# EAGLE board EveryCook_V3 (EAGLE 6.5.0)
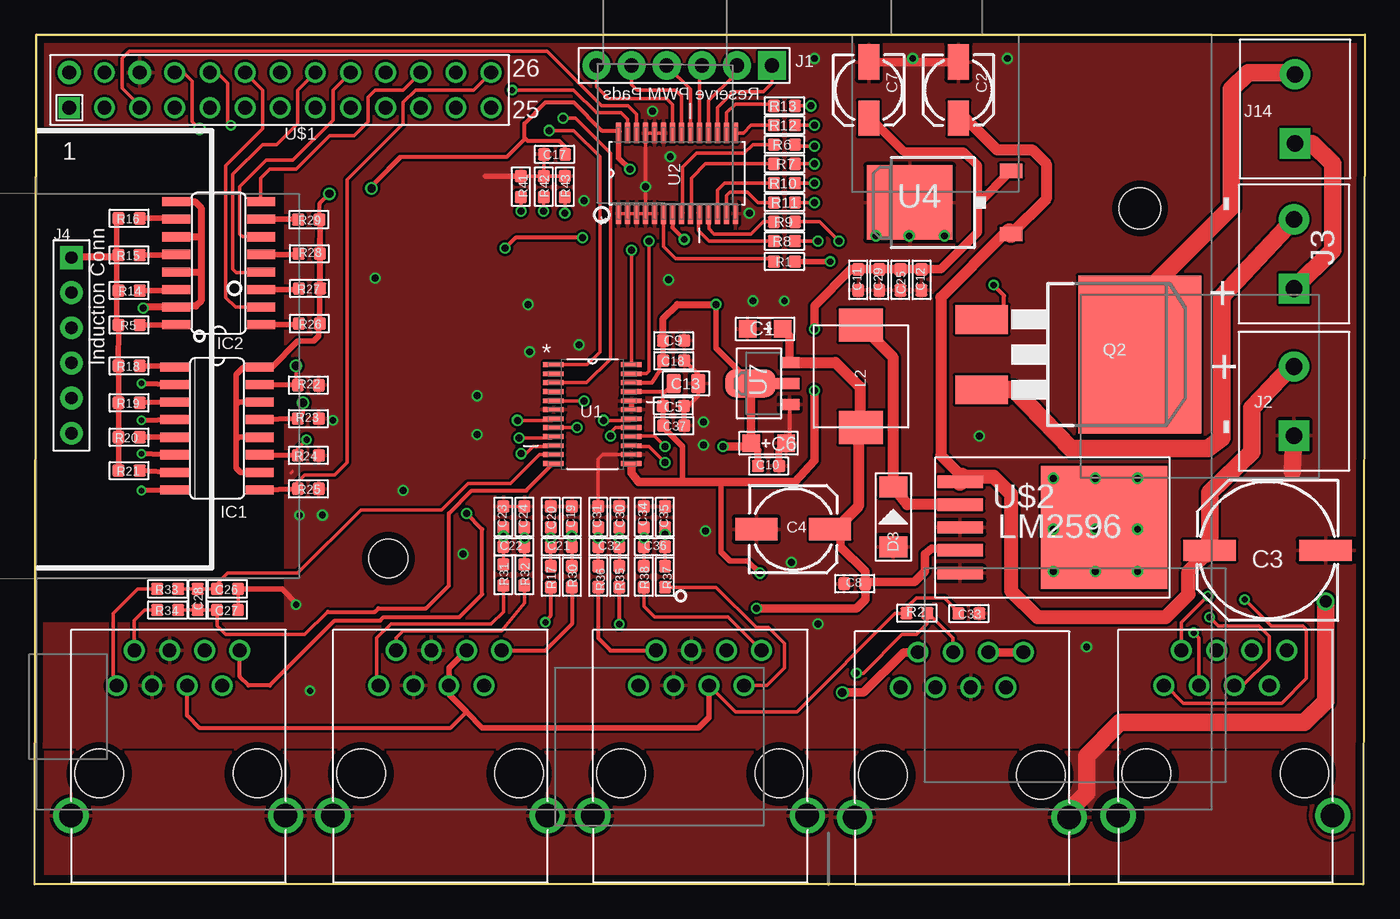
[diagram p0: board, top side]
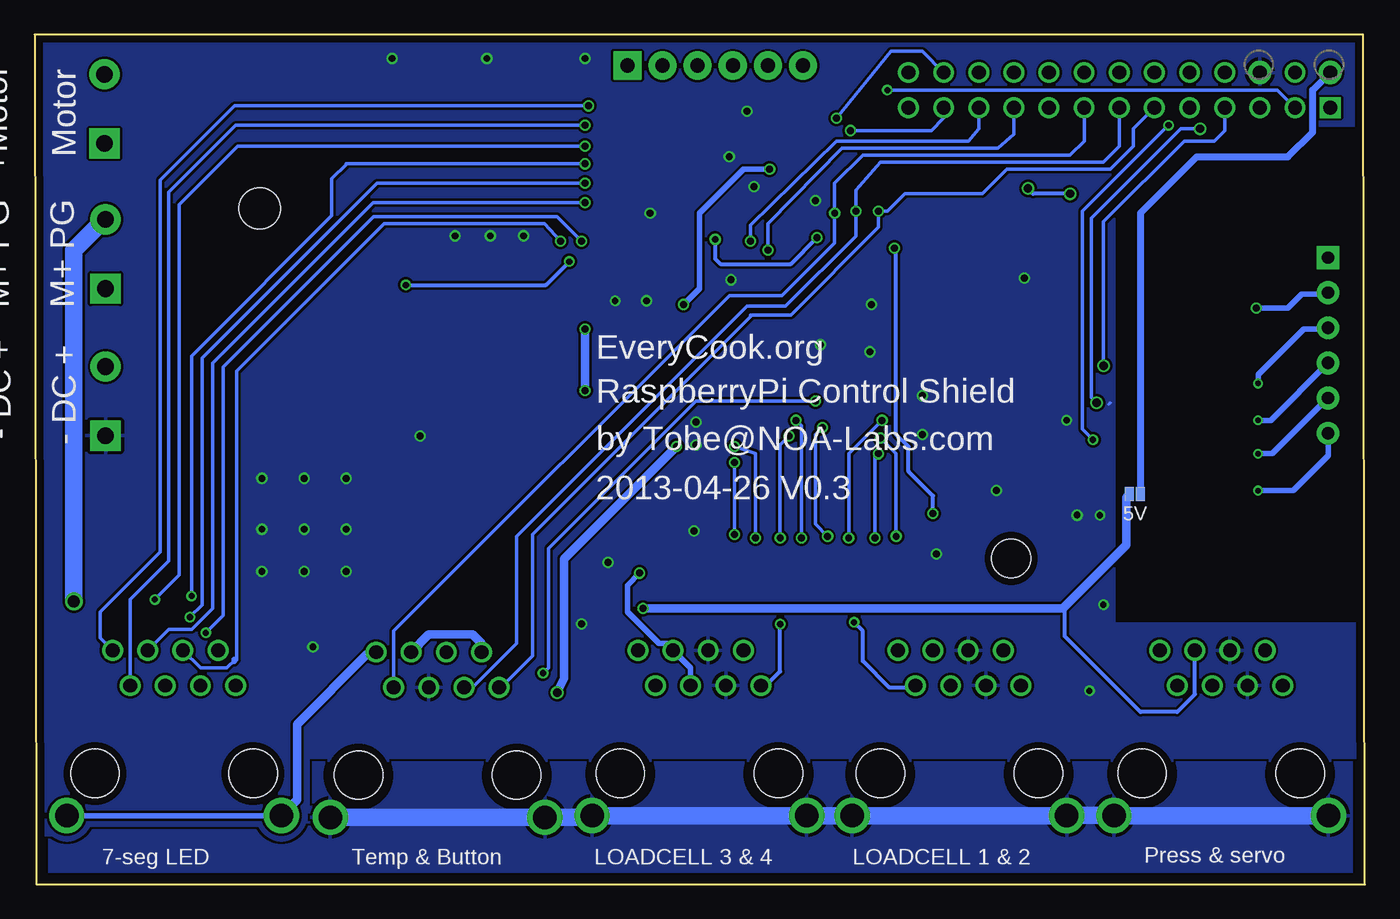
[diagram p1: board, bottom side, seen from below]

Size 96.16 x 61.44 mm. Coordinates in mm from the lower left corner, seen from the top.
Outline: 0.13,61.44 96.16,61.44 96.04,0 0,0 0.13,61.44
Copper layers (1*16): Top 0.035mm / dielectric 1.5mm / Bottom 0.035mm
Design rules "default": minimum track width 7mil, minimum drill 12mil, track to track 7mil, track to pad 7mil, pad to pad 7mil, via to via 7mil, smd to smd 0mil, copper to edge 20mil, drill to drill 10mil, minimum pad ring 10mil, minimum via ring 6mil, stop-mask expansion 2mil, vias tented up to drill 25mil, thermal gap 10mil
Holes 2.8 mm at 25.57,23.56
Holes 3 mm at 79.9,48.87

## Footprints (pad centres in the part's own frame; a part is rotated, then mirrored left to right if it is on the bottom)
AVX-A = smd 1.27 x 1.27: + -1.27,0; - 1.27,0
ELECTRO-SMD-B-4.8MM = smd 2.54 x 1.524: + 2.032,0; - -2.032,0
ELECTRO-SMD-G-10MM = smd 3.81 x 1.524: + 4.191,0; - -4.191,0
ELECTRO-SMD-C-6MM = smd 3.048 x 1.651: + 2.667,0; - -2.667,0
0603 = smd 0.889 x 0.889: 1 -0.762,0; 2 0.762,0
0805 = smd 1.016 x 1.397: 1 -0.889,0; 2 0.889,0
D2010 = smd 1.524 x 2.032: + -2.159,0; - 2.159,0
SO16 = smd 0.66 x 2.032: 1 -4.445,-3.073; 2 -3.175,-3.073; 3 -1.905,-3.073; 4 -0.635,-3.073; 5 0.635,-3.073; 6 1.905,-3.073; 7 3.175,-3.073; 8 4.445,-3.073; 9 4.445,3.073; 10 3.175,3.073; 11 1.905,3.073; 12 0.635,3.073; 13 -0.635,3.073; 14 -1.905,3.073; 15 -3.175,3.073; 16 -4.445,3.073
6P-2.54-80/40MIL = drill 1.016 pad 2.032 square: 1 0,6.35 | drill 1.016 pad 2.032: 2 0,3.81; 3 0,1.27; 4 0,-1.27; 5 0,-3.81; 6 0,-6.35
2P-5.0 = drill 1.2 pad 2.184 square: 1 0,0 | drill 1.2 pad 2.184: 2 5,0
6P-2.54-65/35MIL = drill 0.889 pad 1.651 square: 1 0,6.35 | drill 0.889 pad 1.651: 2 0,3.81; 3 0,1.27; 4 0,-1.27; 5 0,-3.81; 6 0,-6.35
2P-JUMPER = smd 0.635 x 1.016: 1 0,0; 2 0.787,0
0630 = smd 2.4 x 3.2: P$1 -0.4,-2.6; P$2 7,-2.6
D2PAK = smd 2.083 x 3.81: 1 -2.54,-9.525; 3 2.54,-9.525 | smd 11.43 x 8.89: 2 0,1.905
SOP65P640X120-24N = smd 1.473 x 0.356: 1 -2.819,3.581; 2 -2.819,2.921; 3 -2.819,2.286; 4 -2.819,1.626; 5 -2.819,0.965; 6 -2.819,0.33; 7 -2.819,-0.33; 8 -2.819,-0.965; 9 -2.819,-1.626; 10 -2.819,-2.286; 11 -2.819,-2.921; 12 -2.819,-3.581; 13 2.819,-3.581; 14 2.819,-2.921; 15 2.819,-2.286; 16 2.819,-1.626; 17 2.819,-0.965; 18 2.819,-0.33; 19 2.819,0.33; 20 2.819,0.965; 21 2.819,1.626; 22 2.819,2.286; 23 2.819,2.921; 24 2.819,3.581
SOP65P640X110-28N = smd 1.473 x 0.356: 1 -2.921,4.216; 2 -2.921,3.581; 3 -2.921,2.921; 4 -2.921,2.286; 5 -2.921,1.626; 6 -2.921,0.965; 7 -2.921,0.33; 8 -2.921,-0.33; 9 -2.921,-0.965; 10 -2.921,-1.626; 11 -2.921,-2.286; 12 -2.921,-2.921; 13 -2.921,-3.581; 14 -2.921,-4.216; 15 2.921,-4.216; 16 2.921,-3.581; 17 2.921,-2.921; 18 2.921,-2.286; 19 2.921,-1.626; 20 2.921,-0.965; 21 2.921,-0.33; 22 2.921,0.33; 23 2.921,0.965; 24 2.921,1.626; 25 2.921,2.286; 26 2.921,2.921; 27 2.921,3.581; 28 2.921,4.216
TO252 = smd 1.016 x 1.651: 1 -2.286,-4.826; 2 2.286,-4.826 | smd 5.4 x 6.2: 3 0,2.5
SOT89 = smd 0.8 x 1.4: 1 -1.524,-1.905; 3 1.524,-1.905 | smd 0.8 x 1.9: 2 0,-1.651 | smd 2.032 x 3.65: 4 0,0.94
RJ45-N = drill 1: 1 7.62,2.54; 2 6.35,0; 3 5.08,2.54; 4 3.81,0; 5 2.54,2.54; 6 1.27,0; 7 0,2.54; 8 -1.27,0 | drill 1.7: 9 10.93,11.94; 10 -4.58,11.94 | hole 3.5: -2.54,8.89; 8.89,8.89
RASPBERRY-PI = drill 1 square: 1 0,0 | drill 1 pad 1.676: 2 0,2.54; 6 5.08,2.54 | drill 1: 3 2.54,0; 4 2.54,2.54; 5 5.08,0; 7 7.62,0; 8 7.62,2.54; 9 10.16,0; 10 10.16,2.54; 11 12.7,0; 12 12.7,2.54; 13 15.24,0; 14 15.24,2.54; 15 17.78,0; 16 17.78,2.54; 17 20.32,0; 18 20.32,2.54; 19 22.86,0; 20 22.86,2.54; 21 25.4,0; 22 25.4,2.54; 23 27.94,0; 24 27.94,2.54; 25 30.48,0; 26 30.48,2.54
TO-263 = smd 3.302 x 0.889: 1 3.302,-3.302; 2 3.302,-1.651; 3 3.302,0; 4 3.302,1.651; 5 3.302,3.302 | smd 9.144 x 8.89: TAB -7.112,0

## Placement (x,y rotation side)
C1  22uF/10V  [AVX-A]  52.81,40.16 180 top
C2  10uF/25V  [ELECTRO-SMD-B-4.8MM]  66.78,57.43 270 top
C3  220uF/35V  [ELECTRO-SMD-G-10MM]  89.13,24.16 180 top
C4  100uF/16V  [ELECTRO-SMD-C-6MM]  54.84,25.68 0 top
C5  0.1uF  [0603]  46.17,34.59 180 top
C6  22uF/10V  [AVX-A]  53.06,31.9 0 top
C7  22uF/16V  [ELECTRO-SMD-B-4.8MM]  60.3,57.43 270 top
C8  0.1uF  [0603]  59.28,21.74 0 top
C9  0.1uF  [0603]  46.19,39.32 180 top
C10  0.1uF  [0603]  53.06,30.25 180 top
C11  0.1uF  [0603]  59.54,43.71 90 top
C12  0.1uF  [0603]  64.11,43.71 90 top
C13  10Uf  [0805]  47.09,36.22 180 top
C17  0.1uF  [0603]  37.59,52.78 0 top
C18  0.1uF  [0603]  46.2,37.87 180 top
C19  NS  [0603]  38.84,26.57 90 top
C20  NS  [0603]  37.31,26.57 90 top
C21  NS  [0603]  38.07,24.41 0 top
C22  NS  [0603]  34.65,24.41 0 top
C23  NS  [0603]  33.88,26.57 90 top
C24  NS  [0603]  35.41,26.57 90 top
C25  0.1uF  [0603]  62.59,43.71 270 top
C26  NS  [0603]  13.94,21.36 0 top
C27  NS  [0603]  13.94,19.84 0 top
C28  NS  [0603]  11.79,20.6 270 top
C29  0.1uF  [0603]  61.06,43.71 90 top
C30  NS  [0603]  42.27,26.57 90 top
C31  NS  [0603]  40.74,26.57 90 top
C32  NS  [0603]  41.5,24.41 180 top
C33  0.1uF  [0603]  67.54,19.58 180 top
C34  NS  [0603]  44.04,26.57 90 top
C35  NS  [0603]  45.57,26.57 90 top
C36  NS  [0603]  44.81,24.41 180 top
C37  0.1uF  [0603]  46.2,33.17 0 top
D3  M7  [D2010]  62.08,26.57 90 top
IC1  TLP281-4  [SO16]  13.18,32.97 270 top
IC2  TLP281-4  [SO16]  13.31,44.92 90 top
J1  6P-2.54mm  [6P-2.54-80/40MIL]  46.96,59.21 270 top
J2  [2P-5.0]  91.03,32.44 90 top
J3  [2P-5.0]  91.03,43.08 90 top
J4  6P-2.54mm  [6P-2.54-65/35MIL]  2.67,38.97 0 top
J5  JUMPERSMD  [2P-JUMPER]  16.23,28.22 180 bottom
J14  [2P-5.0]  91.11,53.57 90 top
L2  47uH  [0630]  62.33,40.03 270 top
Q2  IRLZ44N  [D2PAK]  77.98,38.3 270 top
R1  1k  [0603]  54.2,45.03 180 top
R2  22k  [0603]  63.78,19.61 0 top
R5  4.7k  [0603]  6.83,40.45 180 top
R6  1k  [0603]  54.2,53.49 0 top
R7  1k  [0603]  54.2,52.1 0 top
R8  1k  [0603]  54.2,46.51 0 top
R9  1k  [0603]  54.2,47.9 0 top
R10  1k  [0603]  54.2,50.7 0 top
R11  1k  [0603]  54.2,49.3 0 top
R12  1k  [0603]  54.2,54.89 0 top
R13  1k  [0603]  54.2,56.29 180 top
R14  51k  [0603]  6.83,42.94 180 top
R15  10k  [0603]  6.83,45.5 180 top
R16  2k  [0603]  6.83,48.16 180 top
R17  0R  [0603]  37.31,22.25 270 top
R18  1k  [0603]  6.83,37.49 180 top
R19  1k  [0603]  6.83,34.82 180 top
R20  1k  [0603]  6.83,32.33 180 top
R21  1k  [0603]  6.83,29.92 180 top
R22  10k  [0603]  19.79,36.09 180 top
R23  10k  [0603]  19.79,33.68 180 top
R24  10k  [0603]  19.79,31.01 180 top
R25  10k  [0603]  19.79,28.6 180 top
R26  1k  [0603]  19.86,40.55 0 top
R27  1k  [0603]  19.87,43.09 0 top
R28  1k  [0603]  19.86,45.6 0 top
R29  1k  [0603]  19.82,48.06 0 top
R30  0R  [0603]  38.84,22.25 270 top
R31  0R  [0603]  33.88,22.38 270 top
R32  0R  [0603]  35.41,22.38 270 top
R33  0R  [0603]  9.63,21.36 180 top
R34  0R  [0603]  9.63,19.84 180 top
R35  0R  [0603]  42.27,22.25 270 top
R36  0R  [0603]  40.74,22.25 270 top
R37  0R  [0603]  45.57,22.25 270 top
R38  0R  [0603]  44.04,22.25 270 top
R41  10k  [0603]  35.15,50.44 270 top
R42  10k  [0603]  36.8,50.44 270 top
R43  10k  [0603]  38.33,50.44 270 top
U1  AD7794BRUZ  [SOP65P640X120-24N]  40.33,34 0 top
U2  PCA9685PW  [SOP65P640X110-28N]  46.44,51.41 90 top
U4  78M05  [TO252]  65.76,49.3 90 top
U7  CJ1117-3.3  [SOT89]  52.68,36.22 90 top
U13  [RJ45-N]  32.49,16.92 180 top
U14  [RJ45-N]  51.28,16.92 180 top
U15  [RJ45-N]  13.56,16.92 180 top
U16  [RJ45-N]  70.21,16.79 180 top
U17  [RJ45-N]  89.26,16.92 180 top
U$1  RASPBERRY-PI  [RASPBERRY-PI]  2.51,56.16 0 top
U$2  LM2596  [TO-263]  70.21,25.81 180 top

## Library data of the parts
C1-C13 C17-C37 D3 J5 L2 Q2 R1 R2 R5-R38 R41-R43 = Discrete
IC1 IC2 U4 U7 U$2 = IC
J1-J4 J14 U13-U17 = Connector
U1 = analog-devices; MPN: AD7794BRUZ; OC_FARNELL: 1078329; OC_NEWARK: 19M0899; PACKAGE: TSSOP-24; SUPPLIER: Analog Devices
U2 = wia; MPN: PCA9685PW; OC_FARNELL: 1854074; OC_NEWARK: 19T6398; PACKAGE: TSSOP-28; SUPPLIER: NXP
U$1 = RaspberryPi

## Nets
3V3: C6.+ C9.2 C10.2 C17.2 C18.2 IC1.10 IC1.12 IC1.14 IC1.16 R26.2 R27.2 R28.2 R29.2 U1.22 U2.28 U7.2 U7.4 U16.2 U16.6 U16.8 U17.9 U17.10
+24V: C2.+ C3.+ J2.2 U4.1 U$2.1
BUTTON: IC2.9 IC2.11 IC2.13 IC2.15 J4.2
CS: U1.3 U$1.24
D5V: C1.+ C4.+ C8.2 J5.2 L2.P$2 U7.3 U15.6 U$2.4
GND: C1.- C2.- C3.- C4.- C5.1 C6.- C7.- C8.1 C9.1 C10.1 C11.1 C12.1 C13.1 C17.1 C18.1 C19.2 C20.2 C23.2 C24.2 C25.2 C26.2 C27.2 C29.1 C30.2 C31.2 C33.1 C34.2 C35.2 C37.2 D3.+ J2.1 R22.1 R23.1 R24.1 R25.1 R41.1 R42.1 R43.1 U1.6 U1.14 U1.19 U1.20 U2.1 U2.2 U2.3 U2.4 U2.5 U2.14 U2.23 U2.24 U2.25 U4.3 U7.1 U13.3 U13.4 U14.3 U14.4 U15.3 U15.4 U16.5 U$1.6 U$2.3 U$2.5
GPIO1: R41.2 U16.1 U$1.11
GPIO2: R42.2 U16.3 U$1.13
GPIO3: R43.2 U16.7 U$1.15
KEY1: IC2.16 R5.1
KEY1S: IC2.2 U$1.12
KEY2: IC2.14 R14.1
KEY2S: IC2.4 U$1.16
KEY3: IC2.12 R15.1
KEY3S: IC2.6 U$1.18
KEY4: IC2.10 R16.1
KEY4S: IC2.8 U$1.22
L5V: C5.2 C7.+ C11.2 C12.2 C13.2 C25.1 C29.2 C33.2 C37.1 R2.1 U1.13 U1.21 U4.2 U13.5 U13.6 U14.5 U14.6 U15.5
LED: IC1.2 J4.3
LED1: IC1.4 J4.4
LED1S: IC1.13 R23.2 U$1.8
LED2: IC1.6 J4.5
LED2S: IC1.11 R24.2 U$1.10
LED3: IC1.8 J4.6
LED3S: IC1.9 R25.2 U$1.26
LED-1: R6.2 U17.1
LED-2: R7.2 U17.2
LED-3: R8.2 U17.3
LED-4: R9.2 U17.4
LED-5: R10.2 U17.5
LED-6: R11.2 U17.6
LED-7: R12.2 U17.7
LED-8: R13.1 U17.8
LEDS: IC1.15 R22.2 U$1.7
LOADCELL1_SIG+: R17.2 U13.7
LOADCELL1_SIG-: R30.2 U13.8
LOADCELL2_SIG+: R31.2 U13.1
LOADCELL2_SIG-: R32.2 U13.2
LOADCELL3_SIG+: R37.2 U14.7
LOADCELL3_SIG-: R38.2 U14.8
LOADCELL4_SIG+: R35.2 U14.1
LOADCELL4_SIG-: R36.2 U14.2
MISO: U1.23 U$1.21
MVCC: J3.1 J14.1
N$2: J14.2 Q2.2
N$3: Q2.1 R1.1
N$4: J1.1 U2.17
N$5: C34.1 C36.2 R38.1 U1.16
N$9: C20.1 C21.1 R17.1 U1.7
N$13: R1.2 U2.6
N$14: J1.2 U2.18
N$20: IC1.1 R18.1
N$21: IC1.3 R19.1
N$22: IC1.5 R20.1
N$23: IC1.7 R21.1
N$24: C22.1 C23.1 R31.1 U1.9
N$25: R6.1 U2.8
N$26: R7.1 U2.9
N$27: R8.1 U2.10
N$28: R9.1 U2.11
N$29: R10.1 U2.12
N$30: R11.1 U2.13
N$31: R12.1 U2.15
N$32: R13.2 U2.16
N$33: J1.3 U2.19
N$34: J1.4 U2.20
N$35: J1.5 U2.21
N$36: J1.6 U2.22
N$40: U1.24 U$1.19
N$42: C22.2 C24.1 R32.1 U1.10
N$44: C27.1 C28.2 R34.1 U1.12
N$45: C30.1 C32.1 R35.1 U1.17
N$46: C31.1 C32.2 R36.1 U1.18
N$47: C35.1 C36.1 R37.1 U1.15
N$48: C19.1 C21.2 R30.1 U1.8
N$53: C26.1 C28.1 R33.1 U1.11
N$58: J5.1 U$1.2
N$65: D3.- L2.P$1 U$2.2
N$67: IC2.1 R26.1
N$68: IC2.3 R27.1
N$69: IC2.5 R28.1
N$70: IC2.7 R29.1
N$91: U15.7
PGND: J3.2 Q2.3 U13.9 U13.10 U14.9 U14.10 U15.9 U15.10 U16.9 U16.10
PRESS_SIG+: R33.2 U15.1
PRESS_SIG-: R34.2 U15.2
SCL: U2.26 U$1.5
SCLK: U1.1 U$1.23
SDA: U2.27 U$1.3
SERVO_SIG: U2.7 U15.8
TEMPER_SIG+: R2.2 U1.5 U16.4
VCC: J4.1 R5.2 R14.2 R15.2 R16.2 R18.2 R19.2 R20.2 R21.2

## Tracks (layer width: path | path; a pad name or v marks a point on that pad's centre or on a via)
3V3  (via drill 0.5, 0.6, 0.61)
  Top 0.254: 42.22,52.52 42.22,53.28 | 26.52,52.6 26.39,52.6 24.61,50.83
  Top 0.305: 20.67,43.76 20.62,43.82 | U1.22 44.62,36.28 45.19,37.11 45.19,37.62 C18.2 | R28.2 20.62,49.25 v21.31,49.94 | v24.36,50.32 24.36,50.44 26.52,52.6 34.14,52.6 35.41,53.87 35.41,54 | 35.41,54 35.41,55.02 36.93,56.54 38.96,56.54 41,54.51 42.27,54.51 42.27,54.38 U2.28 | C17.2 38.35,53.34 37.95,53.75 35.66,53.75 35.41,54
  Top 0.406: 20.68,47.65 20.58,47.74 R29.2 20.58,47.87 20.63,47.87 | 20.63,47.87 R27.2 20.62,45.36 20.62,43.82 R26.2 20.55,40.47 20.55,39.65 20.17,39.27 19.02,39.27 17.17,37.41 IC1.16 16.21,37.36 15.09,37.36 14.58,36.86 14.58,34.7 | 20.63,47.87 R28.2 | U7.4 51.16,36.8 51.16,36.86 49.25,38.76 v49.25,41.94 | U2.28 42.22,52.52 v43.03,51.71 | IC1.10 14.91,29.79 14.58,30.12 14.58,32.16 | 14.58,32.16 14.58,34.7 | IC1.14 14.75,34.87 14.58,34.7 | IC1.12 14.75,32.33 14.58,32.16 | C9.2 C18.2
  Top 0.508: C10.2 52.3,31.39 C6.+ | C9.2 45.43,40.91 46.46,41.94 v49.25,41.94
  Top 0.61: U7.2 51.79,36.22 | 51.79,36.22 U7.4 | 51.79,36.22 C6.+ 51.54,31.65 v49.76,31.65 | U16.6 U16.8 | v58.39,13.87 59.92,13.87 62.84,16.79 U16.2
  Bottom 0.305: v21.31,49.94 23.98,49.94 v24.36,50.32
  Bottom 0.406: U17.10 U17.9 78.27,4.98 78.27,5.04 | v43.03,51.71 44.93,51.71 48.11,48.54 48.11,43.08 v49.25,41.94 | 71.48,16.66 U16.8
  Bottom 0.61: U17.9 78.27,5.04 77.19,6.12 77.19,11.58 72.11,16.66 71.48,16.66 71.35,16.79 | v49.76,31.65 57.89,23.52 57.89,14.88 v58.39,13.87 | U16.2 63.86,17.42 64.49,18.06 67.67,18.06 U16.6
+24V
  Top 0.406: 90.78,37.36 91.03,37.36 J2.2
  Top 0.813: C2.+ 67.28,55.4 69.57,53.11 72.11,53.11 73.13,52.1 73.13,49.56 U4.1 70.08,47.02 65.51,42.44 65.51,31.01 67.03,29.49
  Top 1.016: 67.03,29.49 69.32,29.49 70.59,28.22 70.59,21.23 72.49,19.33 81.76,19.33 83.41,20.98 83.41,22.63 C3.+
  Top 1.27: U4.1 70.46,47.14 | U$2.1 67.03,29.49 | 84.68,23.9 C3.+ 84.94,28.35 87.99,31.27 87.99,34.44 90.78,37.36
BUTTON  (via drill 0.5)
  Top 0.508: v7.85,41.68 7.91,41.74 IC2.15 10.3,41.81 11.66,41.81 12.04,42.19 12.04,44.35 | IC2.9 11.6,49.36 12.04,48.92 12.04,46.76 | 12.04,46.76 12.04,44.35 | IC2.13 11.97,44.28 12.04,44.35 | IC2.11 11.98,46.82 12.04,46.76
  Bottom 0.406: v7.85,41.68 5.56,41.68 4.55,42.7 2.75,42.7 J4.2
CS  (via drill 0.5)
  Top 0.254: v38.2,55.4 39.09,55.4 41.63,52.86 41.63,38 39.92,36.28 U1.3
  Bottom 0.254: v38.2,55.4 34.26,60.22 31.98,60.22 U$1.24
D5V  (via drill 0.5)
  Top 0.305: C4.+ 58.01,25.68 57.95,25.62 | 59.66,32.92 59.66,32.96 L2.P$2 | C8.2 60.17,21.87 | 54.71,37.74 U7.3
  Top 0.61: U7.3 54.58,39.65 C1.+ | v52.17,19.96 59.41,19.96 60.05,20.6 C8.2 60.05,22.63 58.27,24.41 58.27,25.3 57.95,25.62 57.89,25.68 | U$2.4 64.87,24.28 64.36,23.9 64.36,22.63 63.6,21.87 60.17,21.87 59.92,21.87
  Top 0.813: 54.71,37.74 57.89,37.74 59.66,35.97 59.66,32.92 59.54,32.79 59.54,27.33 57.89,25.68
  Bottom 0.305: 17.25,27.99 J5.2 | 21.82,20.09 21.75,20.03 21.69,19.96 21.69,17.93 16.23,12.47 13.56,12.47 12.29,13.74 U15.6
  Bottom 0.406: 21.82,19.96 21.75,19.96 21.75,20.03 | 17.25,27.97 17.02,27.97 J5.2
  Bottom 0.61: v52.17,19.96 21.82,19.96 21.75,20.03 17.25,24.54 17.25,27.97 16.99,28.22
GND  (via drill 0.45, 0.46, 0.5)
  Top 0.203: 18.64,29.87 18.52,29.74
  Top 0.254: U2.1 U2.2 U2.3 U2.4 | U2.4 U2.5 | U2.23 U2.24 U2.25 U2.4 | C23.2 C24.2 | C17.1 36.83,51.23 R42.1 | R43.1 R42.1 | R41.1 R42.1 | U1.14 41.06,31.08 40.74,30.76 C31.2 | C26.2 C27.2
  Top 0.305: U7.1 54.58,32.16 C6.- | C18.1 47.98,36.86 C13.1 47.98,35.33 47.24,34.59 C5.1
  Top 0.406: R41.1 32.61,51.21 | U1.19 U1.20 | C5.1 46.94,33.71 C37.2 | C26.2 17.88,21.36 19.02,20.22
  Top 0.508: C10.1 53.82,31.39 C6.-
  Top 0.61: U4.3 63.26,51.29 | C2.- C7.-
  Top 1.27: J2.1 90.91,29.87
  Bottom 0.203: 18.39,34.82 18.52,34.7
  other vias: 54.2,42.19 60.81,46.89 63.22,46.89 65.76,46.89 39.34,39.01 51.66,48.54 45.95,52.6 44.17,50.44 44.68,55.91 18.9,20.22 19.91,14 19.15,26.7 21.56,33.55 48.36,33.43 48.36,31.78 48.49,25.55 35.79,38.51 30.96,23.9 24.61,43.84 39.73,49.43 35.66,41.94 20.8,26.7 26.64,28.47 31.98,32.54 31.98,35.33 45.82,43.71 51.92,42.19 56.36,59.72 63.47,59.72 70.33,59.72 73.63,29.36 76.68,29.36 79.73,29.36 73.63,25.68 76.68,25.68 79.73,25.68 73.63,22.63 76.68,22.63 79.73,22.63 68.3,32.41 54.71,23.27 56.62,18.82 76.05,17.17
  pour Top (rank 3): 0.23,61.49 96.11,61.49 96.11,0.03 0.1,0.03 0.1,18.82 18.14,18.82 18.14,54.89 0.23,54.89
  pour Bottom (rank 3): 0.23,61.49 96.11,61.49 96.11,0.03 0.1,0.03 0.1,18.82 18.14,18.82 18.14,54.89 0.23,54.89
GPIO1  (via drill 0.5)
  Top 0.254: R41.2 v35.15,48.67
  Bottom 0.254: U16.1 62.46,14.25 60.17,16.54 60.17,25.3 44.42,41.05 44.42,41.17 41.5,41.17 35.15,47.52 v35.15,48.67 34.52,48.67 33.25,49.94 27.66,49.94 25.88,51.71 18.39,51.71 16.74,53.37 16.74,54.64 U$1.11
GPIO2  (via drill 0.5)
  Top 0.254: R42.2 v36.8,48.67
  Bottom 0.254: U$1.13 17.75,53.37 18.9,52.22 35.03,52.22 36.8,50.19 v36.8,48.67 36.8,46.89 41.88,41.81 44.68,41.81 61.32,25.17 61.32,17.42 64.49,14.25 U16.3
GPIO3  (via drill 0.5)
  Top 0.254: R43.2 v38.33,48.54
  Bottom 0.254: U$1.15 20.29,53.75 21.31,52.73 36.3,52.73 38.33,50.7 v38.33,48.54 38.33,46.38 42.14,42.57 45.95,42.57 70.21,18.31 U16.7
KEY1
  Top 0.406: R5.1 10.21,40.45 IC2.16
KEY1S
  Top 0.254: U$1.12 16.48,57.43 16.48,54.64 13.82,51.97 13.82,42.44 14.52,41.74 IC2.2
KEY2
  Top 0.406: R14.1 10.16,42.94 IC2.14
KEY2S
  Top 0.254: U$1.16 19.02,57.43 19.02,55.02 17.5,53.49 16.48,53.49 14.33,51.33 14.33,44.48 14.58,44.22 16.32,44.22 IC2.4
KEY3
  Top 0.406: R15.1 10.19,45.5 IC2.12
KEY3S
  Top 0.254: U$1.18 21.56,57.43 21.56,55.27 18.64,52.35 16.74,52.35 14.83,50.44 14.83,47.02 15.03,46.82 IC2.6
KEY4
  Top 0.406: R16.1 10.15,48.17 IC2.10
KEY4S
  Top 0.254: U$1.22 26.64,57.43 24.61,57.43 24.1,56.92 24.1,55.14 23.09,54.13 21.31,54.13 18.91,51.73 17,51.73 16.36,51.08 16.36,49.43
  Top 0.406: IC2.8 16.36,49.36 16.36,49.43
L5V  (via drill 0.5)
  Top 0.254: 49.63,28.85 49.89,29.11 | 66.9,19.58 65.76,20.73 63.73,20.73 63.09,20.09 63.09,19.58 62.97,19.58 62.2,19.58 55.09,12.47 50.65,12.47 U14.5
  Top 0.305: 46.84,29.36 46.96,29.11 | 52.3,29.11 52.43,29.11 | U1.21 45.44,35.62 | 45.44,35.62 45.61,35.62 C13.2 | C5.2 45.41,35.59 45.44,35.62 | U15.5 11.02,12.22 11.91,11.33 30.07,11.33 31.22,12.47 | U1.13 43.15,30.26 43.15,30.25
  Top 0.406: C5.2 45.41,33.71 C37.1 45.57,33.05 45.57,32.92 46.84,31.65 46.84,29.36 | U13.6 29.95,15.65 U13.5 29.95,13.74 31.22,12.47 32.36,11.33 47.98,11.33 48.74,12.09 U14.5 | v52.43,22.5 51.54,23.39 50.27,23.39 49.63,24.03 49.63,28.85 | C7.+ 60.49,55.4 60.49,55.33 | 66.9,19.58 C33.2 | R2.1 62.97,19.61 62.97,19.58
  Top 0.61: C29.2 C11.2 59.03,44.48 56.36,41.81 v56.36,40.16 | C29.2 61.19,44.48 | C29.2 C25.1 C12.2 65.51,44.48 68.17,47.14 68.17,49.17 | 68.17,49.17 U4.2 | 68.17,49.17 68.17,51.97 67.16,52.98 62.84,52.98 60.49,55.33 60.3,55.52 | v56.36,35.71 56.36,30.63 54.97,29.11 52.43,29.11 49.89,29.11 46.96,29.11 43.66,29.11 43.15,29.74 43.15,30.25
  Bottom 0.305: 50.39,17.42 50.39,17.3
  Bottom 0.406: U14.5 48.74,15.65 U14.6 50.39,17.3 | 50.39,17.42 51.03,17.42 53.31,19.71 53.31,21.62 v52.43,22.5
  Bottom 0.61: v56.36,40.16 v56.36,35.71
LED  (via drill 0.41)
  Top 0.406: IC1.2 v7.72,36.22
  Bottom 0.406: v7.72,36.22 7.72,36.86 4.42,40.16 2.75,40.16 J4.3
LED1  (via drill 0.41)
  Top 0.406: IC1.4 v7.72,33.55
  Bottom 0.406: v7.72,33.55 6.82,33.55 J4.4
LED1S  (via drill 0.6)
  Top 0.254: U$1.8 10.77,58.7 11.4,58.06 11.4,55.14 v11.91,54.64 | v19.41,34.82 19.41,34.06 R23.2
  Top 0.406: IC1.13 R23.2
  Bottom 0.254: v11.91,54.64 13.31,54.64 19.79,48.16 19.79,35.2 v19.41,34.82
LED2  (via drill 0.41)
  Top 0.406: IC1.6 v7.72,31.14
  Bottom 0.406: v7.72,31.14 6.69,31.14 J4.5
LED2S  (via drill 0.46)
  Top 0.254: U$1.10 13.18,58.7 13.94,57.94 13.94,55.14 v14.2,54.89 | v19.66,32.16 19.02,31.52 R24.2
  Top 0.406: IC1.11 R24.2
  Bottom 0.254: v14.2,54.89 20.42,48.67 20.42,32.92 v19.66,32.16
LED3  (via drill 0.41)
  Top 0.406: IC1.8 v7.72,28.47
  Bottom 0.406: v7.72,28.47 5.18,28.47 2.64,31.01 2.64,32.54 2.67,32.54 J4.6
LED3S
  Top 0.254: R25.2 19.02,29.11 19.53,29.62 21.69,29.62 22.58,30.51 22.58,50.95 26.64,55.02 26.64,56.54 27.53,57.43 31.72,57.43 U$1.26
  Top 0.406: IC1.9 R25.2
LED-1  (via drill 0.46, 0.5)
  Top 0.254: R6.2 55.09,53.37 v56.36,53.37 | U17.1 81.76,14.38 83.03,13.11 90.14,13.11 91.92,14.88 91.92,18.44 91.67,18.69 89.38,18.69 v87.48,20.6
  Bottom 0.254: v56.36,53.37 79.6,53.37 79.61,53.36 81.47,53.36 85.7,49.13 85.7,22.38 v87.48,20.6
LED-2  (via drill 0.46, 0.5)
  Top 0.254: R7.2 v56.36,52.1 | U17.2 82.91,18.95 v84.81,20.85
  Bottom 0.254: v56.36,52.1 73.63,52.1 73.63,52.07 73.62,52.06 74.67,51.01 74.67,48.36 84.27,38.76 84.27,38.75 84.81,38.21 v84.81,20.85
LED-3  (via drill 0.46, 0.5)
  Top 0.254: v56.62,46.51 R8.2 | U17.3 84.18,17.81 v83.79,18.19
  Bottom 0.254: v56.62,46.51 58.39,48.29 71.65,48.29 82.52,37.41 82.52,19.46 v83.79,18.19
LED-4  (via drill 0.5)
  Top 0.254: R9.2 56.74,47.9 v58.14,46.51
  Bottom 0.254: v58.14,46.51 59.28,47.78 70.91,47.78 81.57,37.11 81.57,16.31 81.75,16.14 81.77,16.11 | U17.4 84.18,15.65 82.27,15.65 81.64,16.28
  Bottom 0.406: 81.64,16.28 81.75,16.28 81.75,16.14
LED-5  (via drill 0.46, 0.5)
  Top 0.254: R10.2 v56.36,50.7 | U17.5 87.35,14.38 89.26,16.28 89.26,17.93 88.49,18.69 85.57,18.69 v84.94,19.33
  Bottom 0.254: v84.94,19.33 84.05,20.22 84.05,38.06 71.41,50.7 v56.36,50.7
LED-6  (via drill 0.5)
  Top 0.254: R11.2 v56.36,49.3
  Bottom 0.254: U17.6 86.46,18.44 84.81,18.44 83.29,19.96 83.29,37.7 71.68,49.3 v56.36,49.3
LED-7  (via drill 0.5)
  Top 0.254: v56.36,54.89 R12.2
  Bottom 0.254: v56.36,54.89 81.64,54.89 86.47,50.06 86.47,47.54 86.46,47.52 86.46,23.39 89.26,20.6 U17.7
LED-8  (via drill 0.5)
  Top 0.254: R13.1 v56.11,56.29
  Bottom 0.254: v56.11,56.29 81.7,56.29 87.07,50.91 87.07,47.9 87.1,47.9 87.1,24.03 91.41,19.71 91.41,17.81 U17.8
LEDS  (via drill 0.6)
  Top 0.254: v18.9,37.49 18.9,36.22 R22.2
  Top 0.406: IC1.15 R22.2
  Bottom 0.254: U$1.7 10.13,54.51 10.9,53.75 13.06,53.75 18.9,47.9 v18.9,37.49
LOADCELL1_SIG+  (via drill 0.46)
  Top 0.305: R17.2 37.31,19.46 v36.93,18.95
  Bottom 0.305: U13.7 32.61,14.25 34.39,14.25 36.3,16.15 36.3,18.31 v36.93,18.95
LOADCELL1_SIG-
  Top 0.305: R30.2 38.84,18.82 36.93,16.92 U13.8
LOADCELL2_SIG+
  Top 0.254: R31.2 33.88,19.71 32.99,18.82 25.76,18.82 24.74,17.81 24.74,14.5 U13.1
LOADCELL2_SIG-
  Top 0.254: R32.2 35.41,20.35 33.76,18.31 26.64,18.31 26.14,17.81 U13.2
LOADCELL3_SIG+
  Top 0.254: R37.2 49.25,21.49 52.17,18.57 53.06,18.57 54.2,17.42 54.2,15.65 52.93,14.38 U14.7
LOADCELL3_SIG-
  Top 0.254: R38.2 44.04,20.09 44.81,19.33 50.14,19.33 U14.8
LOADCELL4_SIG+  (via drill 0.46)
  Top 0.305: v42.27,18.82 R35.2
  Bottom 0.305: U14.1 43.28,14.38 42.27,15.39 v42.27,18.82
LOADCELL4_SIG-
  Top 0.305: R36.2 40.74,17.81 41.63,16.92 U14.2
MISO  (via drill 0.5)
  Top 0.254: U1.23 44.23,36.92 44.42,37.11 v44.42,46.51
  Bottom 0.254: U$1.21 27.91,54.64 28.68,53.75 38.2,53.75 44.42,47.65 v44.42,46.51
MVCC
  Top 1.27: J14.1 92.35,53.57 93.83,52.1 93.83,45.87 J3.1
N$2
  Top 0.406: Q2.2 79.79,38.3 79.79,38.32
  Top 1.27: J14.2 90.98,58.7 87.73,58.7 86.51,57.48 86.51,48.97 79.98,42.44 79.98,38.51 79.79,38.32 79.73,38.25
N$3  (via drill 0.46)
  Top 0.305: Q2.1 69.62,40.84 70.08,41.3 70.08,42.57 v69.32,43.33
  Top 0.406: R1.1 v57.51,45.03
  Bottom 0.305: v69.32,43.33 59.21,43.33 v57.51,45.03
N$4
  Top 0.254: U2.17 49.36,56.14 50.52,57.3 52.68,57.3 53.31,57.94 J1.1
N$5  (via drill 0.5)
  Top 0.254: R38.1 C36.2 | 44.04,24.54 C36.2 | C36.2 v44.04,25.04 C34.1 | U1.16 43.18,32.41 44.81,32.41 v45.57,31.65
  Bottom 0.254: v44.04,25.04 44.04,31.14 v45.57,31.65
N$9  (via drill 0.5)
  Top 0.254: R17.1 C21.1 v37.31,25.04 C20.1 | v34.9,33.55 37.39,33.55 U1.7
  Bottom 0.254: v37.31,25.04 37.31,31.14 v34.9,33.55
N$13
  Top 0.254: U2.6 45.47,46.1 46.33,45.24 52.98,45.24 R1.2
N$14
  Top 0.254: U2.18 48.72,56.65 50.52,58.45 50.52,58.95 J1.2
N$20
  Top 0.406: R18.1 10.13,37.49 10.13,37.41 IC1.1
N$21
  Top 0.406: IC1.3 R19.1
N$22
  Top 0.406: IC1.5 R20.1
N$23
  Top 0.406: IC1.7 R21.1
N$24  (via drill 0.5)
  Top 0.254: R31.1 C22.1 v33.88,25.17 C23.1 | v35.03,32.28 37.42,32.28 U1.9
  Bottom 0.254: v33.88,25.17 33.88,31.14 v35.03,32.28
N$25
  Top 0.254: R6.1 51.92,53.49 51.28,52.86 47.85,52.86 46.84,51.84 46.84,48.54 46.71,48.41
  Top 0.305: 46.84,48.54 46.82,48.54 U2.8
N$26
  Top 0.254: R7.1 48.49,52.1 47.47,51.08 47.47,48.56 U2.9
N$27
  Top 0.254: R8.1 48.74,46.51 47.98,47.27 47.98,48.54 48.11,48.67
  Top 0.305: 47.98,48.54 48.01,48.54 U2.10
N$28
  Top 0.254: R9.1 52.68,47.9 51.79,47.02 49.12,47.02 48.74,47.4 48.74,48.47 U2.11
N$29
  Top 0.254: R10.1 49.89,50.7 49.38,50.19 49.38,48.51 U2.12
N$30
  Top 0.254: R11.1 52.3,49.3 51.54,50.06 50.27,50.06 50.01,49.81 U2.13
N$31
  Top 0.254: U2.15 51.23,54.33 51.79,54.89 R12.1
N$32
  Top 0.254: U2.16 50.02,55.78 50.65,56.41 53.31,56.41 R13.2
N$33
  Top 0.254: U2.19 48.06,59.03 J1.3
N$34
  Top 0.254: U2.20 47.4,57.5 J1.4
N$35
  Top 0.254: U2.21 46.77,56.99 46.33,57.43 43.54,57.43 43.15,57.81 J1.5
N$36
  Top 0.254: U2.22 46.11,56.38 45.69,56.79 41.5,56.79 40.61,57.68 J1.6
N$40  (via drill 0.5)
  Top 0.254: U1.24 v43.15,45.86 v43.15,45.87
  Bottom 0.254: U$1.19 25.37,54.25 26.52,53.24 37.82,53.24 43.15,47.78 v43.15,45.87
N$42  (via drill 0.5)
  Top 0.254: R32.1 C22.2 v35.41,25.04 C24.1 | v35.15,31.14 35.53,31.14 36.04,31.65 37.44,31.65 U1.10
  Bottom 0.254: v35.41,25.04 35.41,30.89 v35.15,31.14
N$44
  Top 0.254: R34.1 C28.2 C27.1 13.18,18.69 13.82,18.06 19.53,18.06 21.18,19.71 | 36.33,29.24 U1.12
  Top 0.305: 21.18,19.71 24.61,19.71 24.87,19.96 28.3,19.96 29.95,21.62 29.95,26.82 31.6,28.47 35.53,28.47 37.48,30.42 U1.12
N$45  (via drill 0.5)
  Top 0.254: R35.1 C32.1 v42.27,25.04 C30.1 | v41.63,32.41 41.63,32.66 42.01,33.05 43.13,33.05 U1.17
  Bottom 0.254: v42.27,25.04 42.27,31.78 v41.63,32.41
N$46  (via drill 0.5)
  Top 0.254: R36.1 C32.2 v40.74,25.04 C31.1 | v41.12,33.55 43.03,33.55 U1.18
  Bottom 0.254: v40.74,25.04 40.74,33.17 v41.12,33.55
N$47  (via drill 0.5)
  Top 0.254: R37.1 C36.1 v45.57,25.3 C35.1 | 43.21,31.65 44.42,31.65 v45.57,30.51
  Top 0.305: U1.15 43.21,31.65
  Bottom 0.254: v45.57,25.3 v45.57,30.51
N$48  (via drill 0.5)
  Top 0.254: R30.1 C21.2 v38.84,25.17 C19.1 | v39.22,33.05 37.52,33.05 U1.8
  Bottom 0.254: v38.84,25.17 39.73,26.06 39.73,32.54 v39.22,33.05
N$53
  Top 0.254: R33.1 C28.1 C26.1 13.18,21.74 13.94,22.5 19.02,22.5 23.6,27.08 29.44,27.08 31.34,28.98 34.39,28.98 36.49,31.08 U1.11
N$58
  Bottom 0.406: J5.1 16.1,28.22
  Bottom 0.508: U$1.2 3.78,57.43 3.78,54.38 5.56,52.6 12.17,52.6 16.23,48.54 J5.1
N$65
  Top 0.813: U$2.2 63.09,27.46 D3.- 62.08,38.08 L2.P$1
N$67
  Top 0.406: IC2.1 19.02,40.47 R26.1
N$68
  Top 0.406: IC2.3 19.03,43.01 R27.1
N$69
  Top 0.406: IC2.5 19.05,45.55 R28.1
N$70
  Top 0.406: IC2.7 18.96,48.09 19.02,48.03 19.06,48.03 R29.1
PGND  (via drill 0.86)
  Top 0.406: 93.32,20.35 v93.32,20.47
  Top 1.27: 91.03,48.41 J3.2 85.83,42.49 85.83,32.28 84.81,31.52 74.9,31.52 70.79,35.76 Q2.3 | U16.10 74.79,5.37 76.05,6.63 76.05,9.3 78.46,11.71 91.8,11.71 93.32,13.23 93.32,20.35
  Bottom 0.406: 91.16,48.03 91.03,48.03 J3.2 | v93.32,20.47 93.32,20.22
  Bottom 1.27: U15.9 18.01,4.98 18.14,4.85 18.39,4.85 18.52,4.98 U13.9 | U13.9 U13.10 U14.9 U14.10 55.99,4.85 U16.9 U16.10 | v93.32,20.47 93.32,45.87 91.16,48.03
  pour Bottom (isolate 0.762, rank 2): 0.23,8.79 95.86,8.79 95.86,0.28 0.23,0.28
  pour Top (isolate 0.61): 0.61,9.55 95.99,9.55 95.99,0.03 0.1,0.03 0.1,9.55
PRESS_SIG+
  Top 0.254: R33.2 7.47,21.36 5.69,19.58 5.69,14.63 U15.1
PRESS_SIG-
  Top 0.254: R34.2 7.98,19.84 7.21,19.08 U15.2
SCL
  Top 0.254: U2.26 43.52,55.67 42.9,56.29 41,56.29 37.06,60.22 6.83,60.22 6.32,59.72 6.32,57.56 7.59,56.29 U$1.5
SCLK  (via drill 0.5)
  Top 0.254: U1.1 39.94,37.58 40.87,38.51 40.87,52.6 38.96,54.51 v37.19,54.51
  Bottom 0.254: U$1.23 30.45,55.4 31.34,54.51 v37.19,54.51
SDA  (via drill 0.45)
  Top 0.254: U2.27 42.85,55.32 42.39,55.78 40.61,55.78 38.96,57.43 v34.52,57.43
  Bottom 0.254: v34.52,57.43 6.32,57.43 U$1.3
SERVO_SIG  (via drill 0.5)
  Top 0.305: U2.7 46.11,47.49 v46.96,46.63 | v39.6,46.76 34.77,46.76 v34.01,46 | v31.22,26.82 32.36,25.68 32.36,20.98 30.71,19.33 25.25,19.33 24.99,19.08 21.69,19.08 16.99,14.38 15.47,14.38 14.83,15.01 U15.8
  Bottom 0.305: v31.22,26.82 31.22,28.09 32.99,29.87 32.99,31.65 33.88,32.54 33.88,45.87 v34.01,46 | v46.96,46.63 46.96,45.24 46.58,44.86 41.5,44.86 v39.6,46.76
TEMPER_SIG+  (via drill 0.46, 0.5)
  Top 0.254: v39.73,34.95 37.52,34.95 U1.5 | U16.4 66.4,17.81 64.62,19.58 | v59.41,15.27 59.92,15.27 62.71,18.06 63.73,18.06 64.49,18.82 64.49,19.58
  Top 0.406: 64.49,19.58 64.54,19.58 | 64.62,19.58 64.54,19.58 | 64.54,19.58 R2.2
  Bottom 0.254: v39.73,34.95 48.36,34.95 59.03,24.28 59.03,15.65 v59.41,15.27
VCC
  Top 0.406: R21.2 R20.2 R19.2 R18.2 6.05,37.52 R5.2 5.93,40.56 5.93,42.88 R14.2 5.94,43.05 5.94,45.37 R15.2 5.93,45.64 5.93,47.93 R16.2
  Top 0.508: 5.94,45.37 2.71,45.37 J4.1

## Text on the board
tPlace: Reserve PWM Pads | - | + | Induction Conn | + | -
bPlace: +Motor- | Motor | M+ PG | M+ PG | - DC + | - DC + | EveryCook.org | RaspberryPi Control Shield | by Tobe@NOA-Labs.com | 2013-04-26 V0.3 | 5V | Press & servo | LOADCELL 1 & 2 | LOADCELL 3 & 4 | Temp & Button | 7-seg LED
tStop: EveryCook
tDocu: Total Cost: around 60RMB | Change later probably to GPIO